# Altium PCB PCB2.PcbDoc
Units mm, origin at the board's own origin, x right, y up, seen from the top; angles counter-clockwise.
Board outline 15.76 x 39.16 mm, 2 copper layers (Top Layer, Bottom Layer); 20 components, 17 nets, 74 pads, 32 vias.
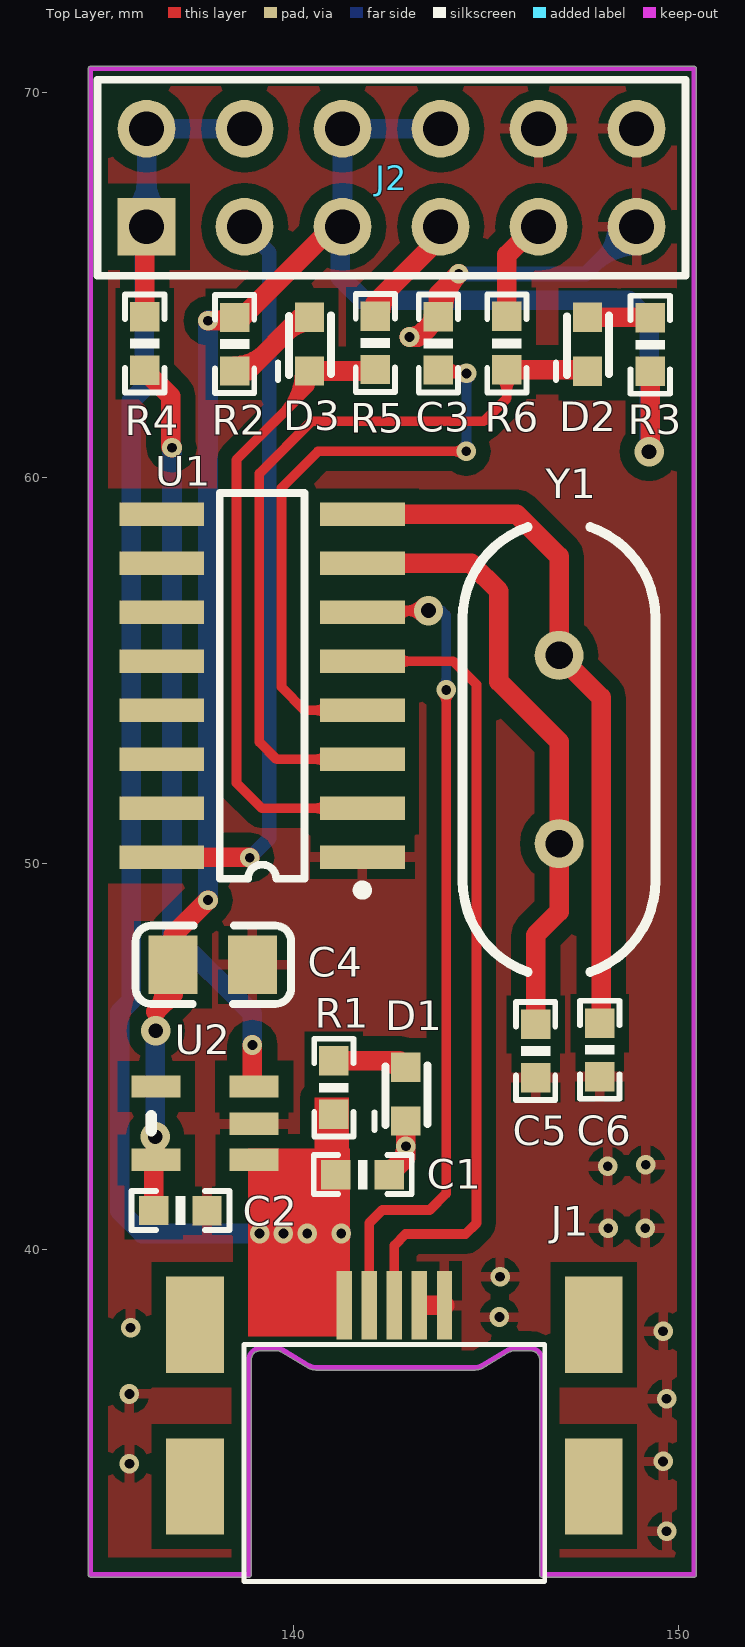
[diagram p0: Top Layer view]
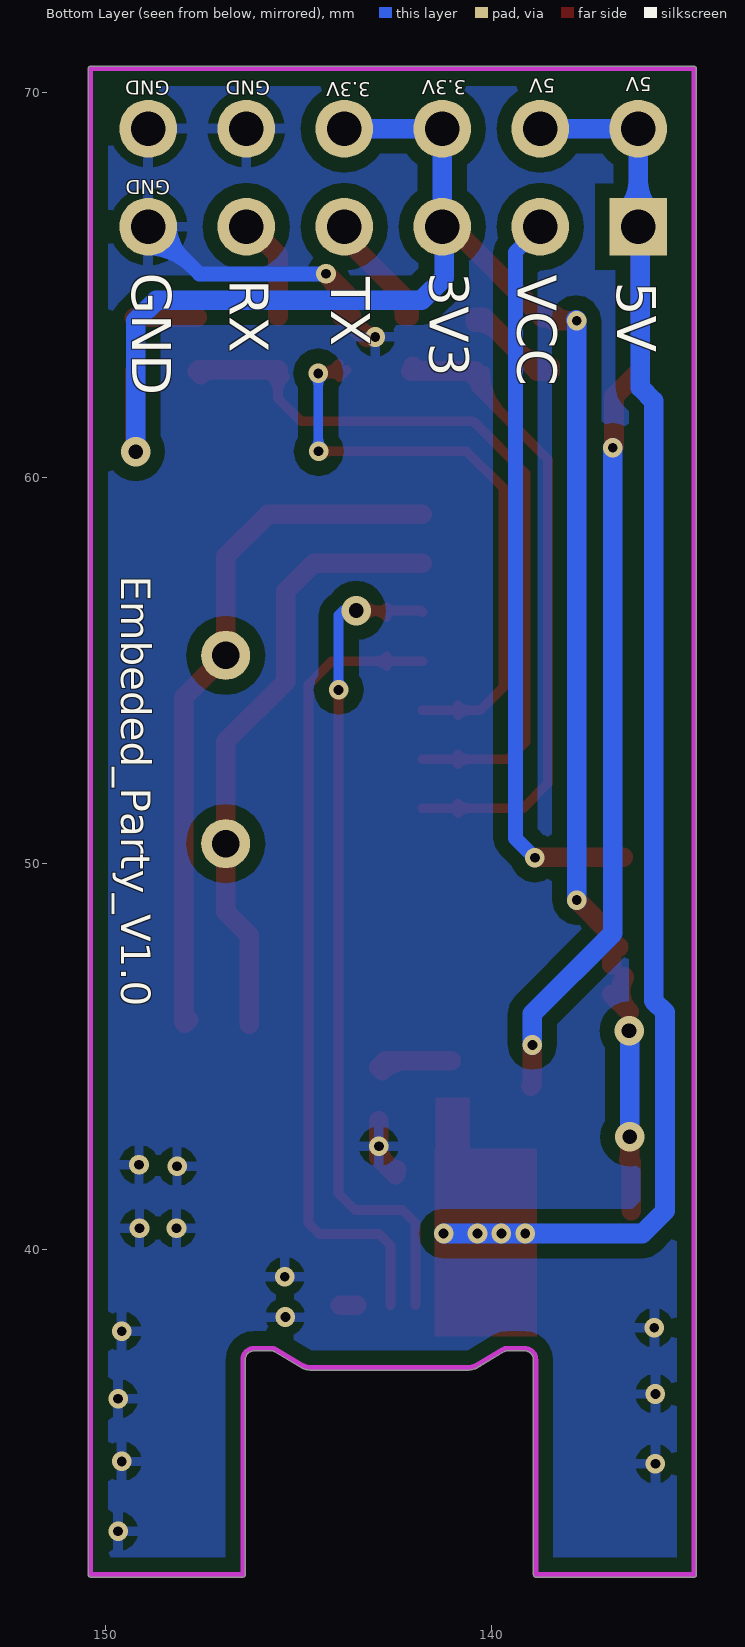
[diagram p1: Bottom Layer view, seen from below]

## Layer stack, top to bottom
Top Layer: signal copper 0.0356
Dielectric: dielectric 0.32, FR-4, Dk 4.8
Bottom Layer: signal copper 0.0356

## Board outline
134.754,31.507 138.85,31.507 ccw(c138.85,31.57) 138.914,31.57 138.914,37.139 cw(c139.15,37.139) 139.15,37.375 cw(c139.15,37.139) 139.15,37.375 139.569,37.375 cw(c139.569,37.139) 139.688,37.342 cw(c139.569,37.139) 139.688,37.342 140.398,36.925 ccw(c140.582,37.239) 140.582,36.875 144.719,36.875 ccw(c144.719,37.239) 144.903,36.925 145.612,37.342 cw(c145.732,37.139) 145.732,37.375 146.15,37.375 cw(c146.15,37.139) 146.386,37.139 146.386,31.57 ccw(c146.45,31.57) 146.45,31.507 150.389,31.507 ccw(c150.389,31.57) 150.453,31.57 150.453,70.603 ccw(c150.389,70.603) 150.389,70.667 134.754,70.667 ccw(c134.754,70.603) 134.69,70.603 134.69,31.57 ccw(c134.754,31.57)

## Design rules (kind name [scope] priority, off if disabled: settings)
Clearance Clearance_1 [InPolygon] p1: gap=0.381
Clearance [All] p2: gap=0.178
HoleToHoleClearance [All] p1: gap=0 allowstackedmicrovias=TRUE
MinimumSolderMaskSliver [All] p1: minsoldermaskwidth=0
PolygonConnect [All] p1: connectstyle=Relief reliefconductorwidth=0.254 reliefentries=4 polygonreliefangle="90 Angle"
RoutingVias [All] p1: holewidth=0.711 width=1.27 viastyle="Through Hole" minholewidth=0.203 minwidth=0.203 maxholewidth=0.711 maxwidth=1.27
SilkToSilkClearance [All] p1: silktosilkclearance=0
SilkscreenOverComponentPads [IsPad] p1: minsilkscreentomaskgap=0
SolderMaskExpansion [All] p1: expansion=0.102
TestPointUsage FabricationTestPointUsage [All] p1: valid=0 allowmultiple=FALSE
Testpoint FabricationTestpoint [(IsPad And (OnTopLayer Or OnBottomLayer))] p1: side=3 testpointundercomponent=TRUE minsize=1.016 maxsize=2.54 preferedsize=1.524 minholesize=0 maxholesize=1.016 preferedholesize=0.813 testpointgrid=0.025 style=297 order=0123456789
Width [All] p1: maxlimit=1.27 minlimit=0.152 preferedwidth=0.254
20 further rules are at their usual default settings.

## Components (designator, comment, footprint, x,y, rotation, side; value= is the part's Value field where it differs from the comment)
C1 "0.1uF" 0603P 141.803,41.939 r180 top
C2 "0.1uF" 0603P 137.081,41.007 r180 top
C3 "0.1uF" 0603P 143.76,63.481 r90 top
C4 "4.7uF" FT_0805_C 138.947,47.379 r180 top
C5 "22" 0603P 146.286,45.147 r270 top
C6 "22" 0603P 147.947,45.175 r270 top
D1 "GREEN" FT_0603_D 142.922,44.725 r270 top
D2 "GREEN" FT_0603_D 147.628,64.162 r270 top
D3 "GREEN" FT_0603_D 140.423,64.166 r270 top
J1 "USB-LINE" FT_USBIF_Micro_BT_CB 141.321,38.301 r180 top locked
J2 "Header 6X2" HDR2X6 136.199,66.509 r0 top
R1 "1k" 0603P 141.052,44.193 r90 top
R2 "1k" 0603P 138.485,63.469 r270 top
R3 "1k" 0603P 149.254,63.451 r90 top
R4 "10k" 0603P 136.154,63.486 r270 top
R5 "0" 0603P 142.128,63.493 r90 top
R6 "0" 0603P 145.535,63.486 r90 top
U1 "CH340G" SOP16M 139.193,54.61 r90 top
U2 "BL8558-33" FT_SOT-23-5 138.989,42.32 r180 top
Y1 "12MHz" XTAL_US 146.891,50.519 r90 top

## Footprints (in the part's own frame and the unit in brackets; to place one, negate y for a bottom-side part, rotate by r counter-clockwise, add the part's x,y. Pads: shape width x height; smd on the part's side, far side on the other; paste and mask are expansions set on the pad)
0603P [mil]
  rect 30x30 smd: 1(-27,0) 2(27.5,-0.06)
  silkscreen extent -50,-20 50,20
FT_0603_D [mil]
  rect 30x30 smd: 1(0,0) 2(55,0)
  silkscreen extent -2,-32 64,22
FT_0805_C [mil]
  rect 50x60 smd: 1(0,0) 2(81,0)
  silkscreen extent -39,-40 119,40
FT_SOT-23-5 [mm]
  rect 1.27x0.58 smd: 1(0,0) 2(0,-0.94) 3(0,-1.905) 4(2.54,-1.905) 5(2.54,0)
  silkscreen extent 2.67,-1.14 2.67,-0.76
FT_USBIF_Micro_BT_CB [mm] "MUP-U526"
  rect 1.5x2.5 smd: 0(-6.47,4.445) 0(-6.47,0.254) 0(3.87,4.445) 0(3.87,0.254)
  rect 0.4x1.778 smd: 1(0,-0.254) 2(-0.65,-0.254) 3(-1.3,-0.254) 4(-1.95,-0.254) 5(-2.6,-0.254)
  silkscreen extent -5.2,0.76 2.6,6.91
HDR2X6 [mm] "Connector; Header; 6x2 Position"
  rect 1.5x1.5 hole 0.9: 1(0,0)
  round 1.5 hole 0.9: 2(0,2.54) 3(2.54,0) 4(2.54,2.54) 5(5.08,0) 6(5.08,2.54) 7(7.62,0) 8(7.62,2.54) 9(10.16,0) 10(10.16,2.54) 11(12.7,0) 12(12.7,2.54)
  silkscreen extent -1.27,-1.27 13.97,3.81
SOP16M [mm]
  rect 0.6x2.2 smd: 1(-4.445,-2.6) 2(-3.175,-2.6) 3(-1.905,-2.6) 4(-0.635,-2.6) 5(0.635,-2.6) 6(1.905,-2.6) 7(3.175,-2.6) 8(4.445,-2.6) 9(4.445,2.6) 10(3.175,2.6) 11(1.905,2.6) 12(0.635,2.6) 13(-0.635,2.6) 14(-1.905,2.6) 15(-3.175,2.6) 16(-4.445,2.6)
  silkscreen extent -5.42,-2.72 5,1.1
XTAL_US [mil]
  round 50 hole 28: 1(0,0) 2(192.13,0)
  silkscreen extent -131,-98 323,98

## Part data
C1 C2 C3: library part GR, "CAP CER .1UF 16V 10% X7R 0603"
C4: library part CAP, "Capacitor"
C5 C6: library part Cap, "Capacitor"
D1 D2 D3: library part LED
J2: "Header, 6-Pin, Dual row"
R1 R2 R3 R4 R5 R6: library part Resistor, "RES 1.0M OHM 1/10W 5% 0603 SMD"
U1: "USB2UART"
U2: library part LDO_5
Y1: library part XTAL_2, "Crystal Oscillator"

## Via types
v1: diameter 0.508, hole 0.254, Top Layer to Bottom Layer, tented both sides, 28 vias
v2: diameter 0.762, hole 0.381, Top Layer to Bottom Layer, tented both sides, 4 vias

## Nets (pads, with @x,y where several pads share a name; then routed paths per layer and width w, separated by ;. In a path a pad name is that pad's centre, name@x,y a point inside that pad or via, vN(x,y) a via of type N, cw(c..) or ccw(c..) an arc to the next point about the centre after c; other vN are vias at no path point)
CH340_D+: J1.3 U1.5 | length 21.7
  Top Layer w0.254: U1.5 144.15,55.245 144.749,54.646 144.749,40.68 144.466,40.397 142.912,40.397 142.621,40.106 J1.3 ; U1.5@142.715,55.123 cw(c143.01,54.827) 143.01,55.245 cw(c143.01,55.663) U1.5@142.715,55.367
CH340_D-: J1.2 U1.6 | length 24.3
  Top Layer w0.254: U1.6 141.838,56.56 v2(143.507,56.56) ; J1.2 141.971,40.684 142.309,41.022 143.54,41.022 143.965,41.447 v1(143.965,54.504) ; U1.6@142.715,56.393 cw(c143.121,55.987) 143.121,56.56 ; U1.6@142.715,56.637 ccw(c142.9,56.822) 142.9,56.56 ; v2@143.328,56.381 ccw(c142.894,55.947) 142.894,56.56 ccw(c142.894,57.174) v2@143.328,56.74 ; v1@143.876,54.414 cw(c143.659,54.197) 143.965,54.197 cw(c144.272,54.197) v1@144.055,54.414
  Bottom Layer w0.254: v2(143.507,56.56) 143.849,56.56 143.965,56.444 v1(143.965,54.504) ; v1@143.876,54.593 ccw(c143.659,54.81) 143.965,54.81 ccw(c144.272,54.81) v1@144.055,54.593
CH340_RX: D2.2 R6.1 U1.3 | length 21.8
  Top Layer w0.254: U1.3@140.87,52.583 ccw(c140.575,52.287) 140.575,52.705 ccw(c140.575,53.123) U1.3@140.87,52.827 ; U1.3 139.574,52.705 139.123,53.156 139.123,60.116 140.473,61.467 144.94,61.467 145.535,62.062 R6.1 ; R6.1@145.356,62.62 cw(c144.922,62.187) 145.535,62.187 cw(c146.148,62.187) R6.1@145.715,62.62
  Top Layer w0.508: R6.1 147.593,62.8 D2.2 ; 147.238,62.8 cw(c147.238,62.374) D2.2@147.538,62.675
CH340_TX: D3.2 R5.1 U1.2 | length 20.1
  Top Layer w0.254: 139.701,61.639 ccw(c138.572,62.769) D3.2@140.169,62.769 ; 140.135,62.073 ccw(c139.439,62.769) D3.2 140.423,62.361 ; D3.2@140.311,62.541 cw(c140.223,62.361) 140.423,62.361 ; D3.2@140.535,62.541 ccw(c140.624,62.361) 140.423,62.361 ; U1.2@140.87,51.313 ccw(c140.575,51.017) 140.575,51.435 ccw(c140.575,51.853) U1.2@140.87,51.557 ; U1.2 139.189,51.435 138.534,52.09 138.534,60.472 140.423,62.361
  Top Layer w0.508: D3.2 R5.1@142.089,62.769 ; 141.728,62.769 ccw(c141.728,63.207) R5.1@142.038,62.897
CH340_VCC: J2.3 U1.16 | length 19.2
  Top Layer w0.508: U1.16 138.864,50.165 v1(138.876,50.152)
  Bottom Layer w0.381: J2.3@138.684,66.548 139.382,65.85 139.382,50.657 v1(138.876,50.152)
GND: C1.1 C2.1 C3.2 C4.1 C5.2 C6.2 D1.2 J1.4 J1.5 J2.10 J2.11 J2.12 U1.1 U2.2 | length 15.4
  Top Layer w0.508: C1.1@142.455,42.062 ccw(c142.289,42.672) v1(142.922,42.672) ; C1.1 142.922,42.373 v1(142.922,42.672) ; C1.1@142.71,42.161 ccw(c142.198,42.672) v1(142.922,42.672) ; D1.2 v1(142.922,42.672) ; C3.2@143.388,63.806 cw(c143.014,64.18) v1(143.014,63.651) ; 143.495,38.555 J1.5 ; C3.2@143.636,64.196 cw(c143.014,64.278) v1(143.014,63.651) ; C3.2@143.888,64.19 cw(c145.281,64.305) v1(144.293,65.293) 143.761,64.762 C3.2 143.233,63.651 v1(143.014,63.651)
  Bottom Layer w0.381: v1@144.301,65.285 147.581,65.285 J2.11@148.844,66.548 ; 147.784,65.488 cw(c148.899,64.372) J2.11@148.899,65.95 ; 148.01,65.714 ccw(c147.215,66.509) J2.11@148.339,66.509
  other v1: 149.68,32.696 135.755,34.445 149.588,34.506 149.68,36.132 135.755,36.254 149.588,37.88 135.785,37.972 145.345,38.25 145.363,39.292 148.167,40.551 149.126,40.551 148.153,42.159 149.14,42.193
NetC3_1: C3.1 U1.4 | length 19.4
  Top Layer w0.254: U1.4@140.87,53.853 ccw(c140.575,53.557) 140.575,53.975 ccw(c140.575,54.393) U1.4@140.87,54.097 ; U1.4 140.295,53.975 139.694,54.576 139.694,59.735 140.646,60.688 v1(144.484,60.688) ; C3.1 143.847,62.708 v1(144.493,62.708) cw(c144.493,63.413) C3.1@143.954,62.958 ; C3.1@143.939,62.615 cw(c144.163,62.392) 144.163,62.708 ; v1@144.383,62.644 ccw(c144.118,62.491) 144.197,62.787 ccw(c144.277,63.083) v1@144.43,62.818 ; v1@144.394,60.598 ccw(c144.177,60.381) 144.177,60.688 ccw(c144.177,60.994) v1@144.394,60.777 ; v1@144.404,62.618 ccw(c144.187,62.401) 144.187,62.708 ccw(c144.187,63.014) v1@144.404,62.797
  Bottom Layer w0.254: v1@144.394,60.777 ccw(c144.153,61.018) 144.493,61.018 ; v1@144.404,62.618 cw(c144.187,62.401) 144.493,62.401 cw(c144.8,62.401) v1@144.583,62.618 ; v1(144.484,60.688) 144.493,60.697 v1(144.493,62.708) ; 144.493,60.971 ccw(c144.767,60.971) v1@144.573,60.777
NetC5_1: C5.1 U1.7 Y1.1 | length 16
  Top Layer w0.508: U1.7 144.611,57.785 145.333,57.063 145.333,54.72 146.891,53.161 Y1.1 146.891,48.754 146.286,48.149 C5.1
NetC6_1: C6.1 U1.8 Y1.2 | length 18.5
  Top Layer w0.508: U1.8 145.799,59.055 146.891,57.962 Y1.2 147.983,54.307 147.983,45.897 C6.1 ; C6.1@147.857,45.951 ccw(c147.552,46.255) 147.983,46.255
NetD1_1: D1.1 R1.2 | length 2.6
  Top Layer w0.508: R1.2 142.756,44.891 D1.1 ; 142.214,44.891 cw(c142.214,44.017) D1.1@142.832,44.635
NetD2_1: D2.1 R3.2 | length 1.6
  Top Layer w0.508: D2.1 149.243,64.162 R3.2
NetD3_1: D3.1 R2.2 | length 4
  Top Layer w0.508: R2.2 138.814,62.771 140.209,64.166 D3.1 ; R2.2@138.484,62.898 ccw(c138.484,64.002) 139.264,63.221 ; 139.84,63.797 cw(c140.423,63.214) D3.1@140.423,64.039
NetJ2_7: J2.7 R5.2 | length 3.9
  Top Layer w0.508: R5.2 142.13,64.541 143.764,66.175 J2.7@143.764,66.548 ; R5.2@142.257,64.192 cw(c143.406,64.192) 142.593,65.004
NetJ2_9: J2.9 R6.2 | length 2.7
  Top Layer w0.508: R6.2 145.537,65.781 J2.9@146.304,66.548
NetR4_2: R4.2 U2.3 | length 19.7
  Top Layer w0.508: R4.2 136.827,62.112 136.827,60.813 v1(136.859,60.781) ; v1(138.943,45.3) 138.943,44.271 U2.3
  Bottom Layer w0.508: v1(136.859,60.781) 136.859,48.195 138.943,46.112 v1(138.943,45.3)
VCC5V: C1.2 J1.1 J2.1 J2.2 J2.4 R1.1 R4.1 U2.1 | length 43.1
  Top Layer w0.508: J2.1@136.144,66.548 136.154,66.538 R4.1 ; 141.052,42.375 ccw(c141.538,42.375) C1.2@141.194,42.031 ; R1.1 141.052,41.994 C1.2
  Bottom Layer w0.508: J2.1@135.848,66.86 ccw(c135.002,67.707) 136.199,67.707 ccw(c137.396,67.707) J2.1@136.55,66.86 ; J2.1@136.144,66.548 136.144,62.337 135.798,61.991 135.798,46.446 135.505,46.153 135.505,40.999 136.091,40.413 v1(139.128,40.413) v1(139.746,40.413) v1(140.364,40.413) v1(141.245,40.413) ; J2.1 J2.2 J2.4
VCC_3V3: C2.2 C4.2 J2.5 J2.6 J2.8 R2.1 R3.1 U2.5 | length 49.5
  Top Layer w0.508: C2.2 136.382,42.253 U2.5 136.422,42.348 v2(136.422,42.919) ; C4.2@136.558,47.063 cw(c135.906,46.692) 136.437,46.162 136.889,46.615 ; C4.2@136.704,47.839 ccw(c136.531,48.153) 136.889,48.153 ; C4.2 136.889,48.153 ; C4.2@137.074,47.839 cw(c137.248,48.153) 136.889,48.153 ; v1(137.792,49.056) 136.889,48.153 ; v1(137.792,64.071) 138.401,64.071 R2.1 138.679,64.155 141.072,66.548 J2.5@141.224,66.548 ; v1@137.975,64.071 ccw(c137.975,64.665) R2.1@138.395,64.245 ; v2(149.225,60.68) 149.254,60.709 R3.1
  Bottom Layer w0.508: v2(136.422,42.919) v2@136.422,45.668 ; v1(137.792,49.056) v1(137.792,64.071) v1@137.812,64.091 ; J2.5@141.224,66.548 141.224,65.196 141.816,64.604 148.692,64.604 149.225,64.071 v2(149.225,60.68) ; J2.5 J2.6 J2.8
  other v2: 136.437,45.668
pads on no net: J1.0 U1.9 U1.10 U1.11 U1.12 U1.13 U1.14 U1.15 U2.4

## Polygon pours and split planes (outlines as drawn)
GND on Top Layer "Top Layer-No Net 1" (solid, remove dead copper, pour order 8): 134.7,70.824 134.637,70.761 134.637,31.619 150.319,31.619 150.51,31.81 150.51,70.697 134.573,70.697
GND on Bottom Layer "Top Layer-No Net 1" (solid, remove dead copper, pour order 5): 134.695,70.628 134.7,70.633 150.319,70.633 150.319,31.64 150.389,31.57 150.34,31.619 134.573,31.619 134.573,70.506 134.764,70.697

## Keep-outs
Keep-Out Layer:
  lines w0.127: 140.582,36.939 144.719,36.939 ccw(c144.719,37.239) 144.871,36.98 145.58,37.397 cw(c145.732,37.139) 145.732,37.439 146.15,37.439 cw(c146.15,37.139) 146.45,37.139 ; 140.582,36.939 cw(c140.582,37.239) 140.43,36.98 139.721,37.397 ccw(c139.569,37.139) 139.569,37.439 139.15,37.439 ccw(c139.15,37.139) 138.85,37.139 ; 138.85,31.57 138.85,37.139 ; 138.85,31.57 138.85,37.139 ; 138.85,31.57 138.85,37.139 ; 138.85,31.57 138.85,37.139 ; 138.85,31.57 134.754,31.57 134.754,70.603 150.389,70.603 150.389,31.57 146.45,31.57 ; 146.45,31.57 146.45,37.139 ; 146.45,31.57 146.45,37.139

## Other copper
Top Layer:
  rectangle net VCC5V: 138.822,37.745 141.477,42.615
  rectangle net VCC5V: 140.555,41.496 141.451,43.941

## Silkscreen, mask and mechanical layers (free items; w line width, h text height)
Bottom Overlay:
  text "5V" at 135.848,70.512 h0.64 r180
  text "5V" at 138.351,70.473 h0.64 r180
  text "3.3V" at 140.659,70.432 h0.64 r180
  text "GND" at 145.74,70.424 h0.64 r180
  text "GND" at 148.34,70.423 h0.64 r180
  text "3.3V" at 143.127,70.383 h0.64 r180
  text "GND" at 148.324,67.843 h0.64 r180
  text "3V3" at 141.602,65.33 h1.02 r90
  text "GND" at 149.31,65.32 h1.02 r90
  text "VCC" at 139.316,65.26 h1.02 r90
  text "TX" at 144.152,65.198 h1.02 r90
  text "RX" at 146.791,65.146 h1.02 r90
  text "5V" at 136.738,65.085 h1.02 r90
  text "Embeded_Party_V1.0" at 149.597,57.458 h0.76 r90